# Altium PCB PCB1.PcbDoc (part 2 of 2)
Units mm, origin at the board's own origin, x right, y up, seen from the top; angles counter-clockwise.
Board outline 100 x 100 mm, 2 copper layers (Top Layer, Bottom Layer); 175 components, 138 nets, 674 pads, 476 vias.
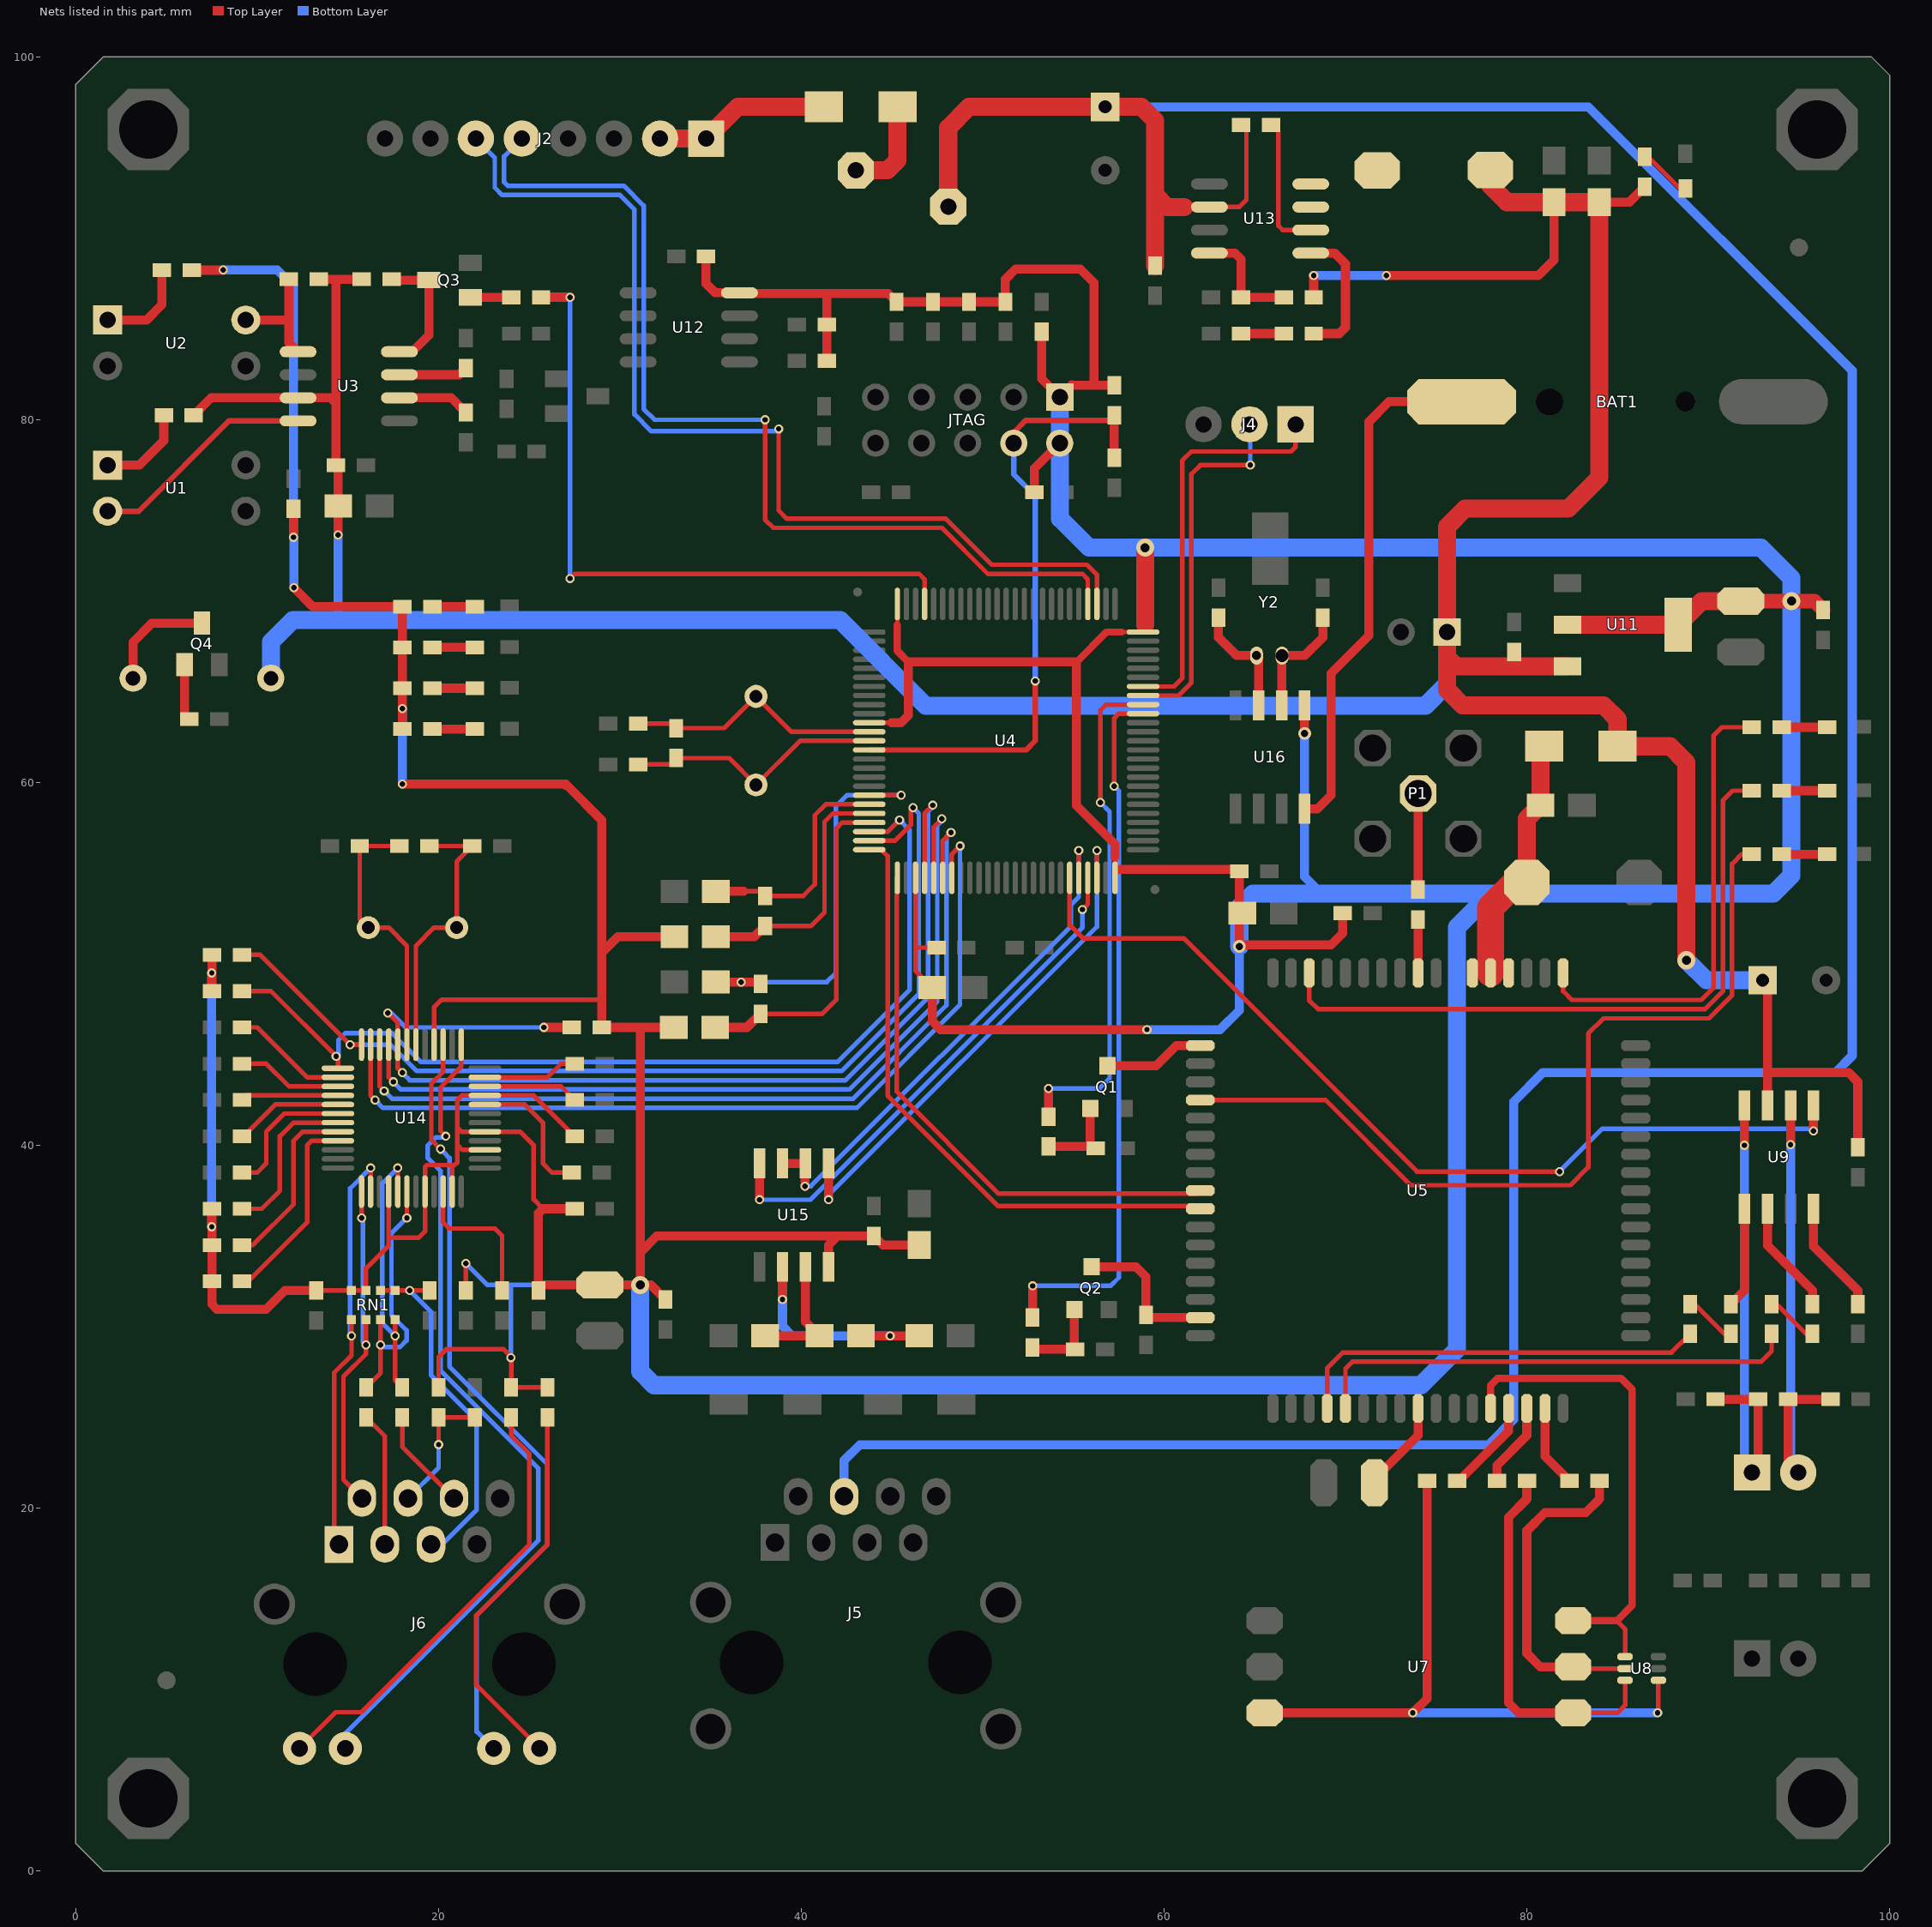
[diagram p2: the nets of this part, all layers, seen from the top]

## Via types
v1: diameter 0.5, hole 0.3, Top Layer to Bottom Layer, tented both sides, 470 vias
v2: diameter 1, hole 0.5, Top Layer to Bottom Layer, tented both sides, 4 vias
v3: diameter 0.7, hole 0.4, Top Layer to Bottom Layer, tented both sides, 2 vias

## Nets (pads, with @x,y where several pads share a name; then routed paths per layer and width w, separated by ;. In a path a pad name is that pad's centre, name@x,y a point inside that pad or via, vN(x,y) a via of type N, cw(c..) or ccw(c..) an arc to the next point about the centre after c; other vN are vias at no path point) (continued)
NET_CS: R61.2 U4.29 U14.32 | length 60.1
  Top Layer w0.254: v1(17.2,47.3) 17.75,46.75 U14.32@17.75,45.55 17.75,44.25 v1(18,44) ; U4.29@46.794,54.748 46.794,58.294 v1(47.25,58.75)
  Top Layer w0.5: v1(25.8,46.5) R61.2@27.349,46.5
  Bottom Layer w0.254: v1(17.2,47.3) 17.377,47.3 18.177,46.5 v1(25.8,46.5) ; v1(18,44) 18.414,43.586 42.431,43.586 46.984,48.139 46.984,58.392 47.25,58.658 v1(47.25,58.75)
NET_INT: R53.2 U4.24 U14.36 | length 56.4
  Top Layer w0.254: R53.2@9.151,50.5 9.25,50.5 10.163,50.5 v1(15.113,45.55) U14.36@15.75,45.55 ; U4.24@43.744,56.798 45.168,56.798 46.046,57.676 46.046,58.518 v1(46.152,58.623)
  Bottom Layer w0.254: v1(15.113,45.55) 17.342,45.55 18.798,44.094 42.221,44.094 46.476,48.35 46.476,58.299 v1(46.152,58.623)
NET_RST: R59.2 U4.23 U14.37 | length 53.8
  Top Layer w0.254: R59.2@9.151,48.5 10.758,48.5 v1(14.351,44.907) 14.45,44.808 U14.37@14.45,44.25 ; U4.23@43.744,57.298 44.776,57.298 v1(45.415,57.937)
  Bottom Layer w0.254: v1(14.351,44.907) 14.482,45.038 14.482,45.811 14.852,46.181 17.43,46.181 19.008,44.602 42.01,44.602 45.968,48.56 45.968,57.385 v1(45.415,57.937)
NetBAT1_1: BAT1.1 U16.8 | length 28.8
  Top Layer w0.5: U16.8@67.75,58.55 68.45,58.55 69.2,59.3 69.2,66.018 71.282,68.1 71.282,79.882 72.4,81 74.8,81 BAT1.1@76.398,81
NetBEEP1_2: BEEP1.2 Q4.3 | length 6.2
  Top Layer w0.5: BEEP1.2@3.15,65.75 3.15,67.75 4.186,68.786 Q4.3@6.952,68.786
NetC10_2: C10.2 Q2.3 U5.16 | length 8.4
  Top Layer w0.5: Q2.3@56,33.302 58.448,33.302 59,32.75 C10.2@59,30.651 59.151,30.5 U5.16@62,30.5
NetC11_1: C11.1 L1.2 U4.20 | length 12.8
  Top Layer w0.254: 36.83,54 C11.1@38,54 ; C11.1@38,53.75 40.107,53.75 40.742,54.385 40.742,58.191 41.348,58.798 U4.20@43.744,58.798
  Top Layer w0.5: L1.2@35.286,54 36.83,54
NetC11_2: C11.2 L2.2 U4.21 | length 14.2
  Top Layer w0.254: C11.2@38,52.099 40.538,52.099 41.275,52.836 41.275,57.836 41.737,58.298 U4.21@43.744,58.298
  Top Layer w0.5: L2.2@35.286,51.5 37.401,51.5 C11.2@38,52.099
NetC12_1: C12.1 U5.26 | length 5
  Top Layer w0.5: C12.1@71.5,21.5 74,24 U5.26@74,25.5
NetC17_1: C17.1 L3.1 U4.22 | length 18.7
  Top Layer w0.254: C17.1@37.75,47.25 41.154,47.25 41.935,48.031 41.935,57.48 42.253,57.798 U4.22@43.744,57.798
  Top Layer w0.5: L3.1@35.25,46.5 37,46.5 C17.1@37.75,47.25
NetC17_2: C17.2 L4.2 U4.19 | length 22.6
  Top Layer w0.254: U4.19@43.744,59.298 v1(45.506,59.298)
  Top Layer w0.5: L4.2@35.286,49 v1(36.678,49) C17.2@37.651,49
  Bottom Layer w0.254: v1(36.678,49) 41.405,49 41.91,49.505 41.91,58.699 42.509,59.298 v1(45.506,59.298)
NetC23_1: C23.1 R24.2 | length 2.9
  Top Layer w0.254: C23.1@89,31.25 89.25,31.25 90.901,29.599 R24.2@91.25,29.599
NetC24_1: C24.1 R25.2 | length 2.9
  Top Layer w0.254: C24.1@93.5,31.25 93.75,31.25 95.401,29.599 R25.2@95.75,29.599
NetC25_1: C25.1 U9.4 | length 6.3
  Top Layer w0.5: U9.4@95.81,36.5 95.81,34.44 98.25,32 C25.1@98.25,31.25
NetC31_1: C31.1 C33.2 J3.1 U9.8 | length 26.9
  Top Layer w0.5: C33.2@90.401,26 C31.1@92.75,26 92.75,22.29 J3.1@92.42,21.96 ; v1(92,40) U9.8@92,42.2
  Bottom Layer w0.5: v1(92,40) 92,22.38 J3.1@92.42,21.96
NetC31_2: C31.2 C34.1 J3.2 U9.6 | length 27
  Top Layer w0.5: v1(94.54,40.04) U9.6@94.54,42.2 ; J3.2@94.96,21.96 94.401,22.519 C31.2@94.401,26 C34.1@96.75,26
  Bottom Layer w0.5: v1(94.54,40.04) 94.54,22.38 J3.2@94.96,21.96
NetC43_1: C43.1 R42.2 | length 2.3
  Top Layer w0.5: C43.1@64.25,84.75 R42.2@66.599,84.75
NetC56_2: C56.2 U14.20 | length 7.7
  Top Layer w0.254: U14.20@22.55,42.25 24.75,42.25 25.75,41.25 25.75,39 26.25,38.5 C56.2@27.349,38.5
NetC57_1: C57.1 U14.22 | length 5.3
  Top Layer w0.254: U14.22@22.55,43.25 26.75,43.25 C57.1@27.5,42.5
NetC58_2: C58.2 U16.2 Y2.1 | length 6.5
  Top Layer w0.5: U16.2@66.48,64.25 66.48,66.98 Y2.1@66.5,67 67.75,67 68.75,68 C58.2@68.75,69.099
NetC59_2: C59.2 U16.3 Y2.2 | length 6.4
  Top Layer w0.5: C59.2@63,69.099 63,68 64,67 Y2.2@65.1,67 65.21,66.89 U16.3@65.21,64.25
NetC60_2: C60.2 R60.1 U14.30 Y3.1 | length 15.3
  Top Layer w0.254: U14.30@18.75,45.55 18.75,51 19.75,52 Y3.1@21,52 21,55.651 C60.2@21.849,56.5 R60.1@19.5,56.5
NetC61_2: C61.2 R60.2 U14.31 Y3.2 | length 14.9
  Top Layer w0.254: R60.2@17.849,56.5 C61.2@15.651,56.5 15.651,52.469 Y3.2@16.12,52 17.25,52 18.25,51 U14.31@18.25,45.55
NetC64_1: C64.1 J6.5 RN1.1 RN1.3 | length 19.6
  Top Layer w0.254: RN1.3@16.8,32 RN1.1@17.6,32 v1(18.4,32) C64.1@19.5,32
  Bottom Layer w0.254: v1(18.4,32) 19.58,30.82 19.58,27.32 22.1,24.8 22.1,19.9 20.2,18 J6.5@19.58,18
NetC65_1: C65.1 J6.3 | length 7.4
  Top Layer w0.254: C65.1@16,25 17.04,23.96 J6.3@17.04,18
NetC66_1: C66.1 J6.6 | length 5.6
  Top Layer w0.254: C66.1@18,25 18,23.39 J6.6@20.85,20.54
NetC68_1: C68.1 J6.4 R64.1 | length 7.2
  Top Layer w0.254: v1(20,23.5) R64.1@20,25 C68.1@22,25
  Bottom Layer w0.254: J6.4@18.31,20.54 20,22.23 v1(20,23.5)
NetD1_1: D1.1 R10.1 | length 2.5
  Top Layer w0.5: R10.1@94.05,56.05 D1.1@96.55,56.05
NetD2_1: D2.1 R15.1 | length 2.5
  Top Layer w0.5: R15.1@94.05,59.55 D2.1@96.55,59.55
NetD3_1: D3.1 R19.1 | length 2.5
  Top Layer w0.5: R19.1@94.05,63.05 D3.1@96.55,63.05
NetD4_2: D4.2 F2.1 | length 5.5
  Top Layer w1: F2.1@43,93.75 44.75,93.75 45.3,94.3 D4.2@45.3,97.25
NetD6_1: D6.1 R37.2 | length 2.3
  Top Layer w0.5: R37.2@19.651,69.7 D6.1@22,69.7
NetD7_1: D7.1 R38.2 | length 2.3
  Top Layer w0.5: R38.2@19.651,67.45 D7.1@22,67.45
NetD8_1: D8.1 R39.2 | length 2.3
  Top Layer w0.5: R39.2@19.651,65.2 D8.1@22,65.2
NetD9_1: D9.1 R40.2 | length 2.3
  Top Layer w0.5: R40.2@19.651,62.95 D9.1@22,62.95
NetD10_1: D10.1 R72.1 | length 3
  Top Layer w0.254: R72.1@86.5,94.5 86.7,94.5 88.45,92.75 D10.1@88.75,92.75
NetF3_1: F3.1 R58.2 U15.6 | length 12.6
  Top Layer w0.5: v1(38.96,31.5) U15.6@38.96,33.3 ; R58.2@43.286,29.5 v1(44.893,29.5) F3.1@46.5,29.5
  Bottom Layer w0.5: v1(38.96,31.5) 38.96,30.04 39.5,29.5 v1(44.893,29.5)
NetF4_1: F4.1 R58.1 U15.7 | length 7.1
  Top Layer w0.5: F4.1@38,29.5 R58.1@41,29.5 40.23,30.27 U15.7@40.23,33.3
NetJ6_9: J6.9 R62.2 | length 24.7
  Top Layer w0.254: J6.9@12.325,6.75 14.325,8.75 15.75,8.75 25,18 25,23 24,24 R62.2@24,24.999
NetJ6_10: J6.10 U14.25 | length 47
  Top Layer w0.254: v1(20.4,40.5) 20.108,40.792 20.108,43.19 20.8,43.882 20.8,43.9 21.25,44.35 U14.25@21.25,45.55
  Bottom Layer w0.254: J6.10@14.856,6.75 14.856,7.378 14.856,7.574 25.492,18.21 25.492,22.19 20.1,27.582 20.1,38.6 19.4,39.3 19.4,39.992 19.839,40.431 20.331,40.431 v1(20.4,40.5)
NetJ6_11: J6.11 U14.27 | length 43.6
  Top Layer w0.254: v1(20.1,39.8) 19.6,40.3 19.6,43.4 20.25,44.05 U14.27@20.25,45.55
  Bottom Layer w0.254: v1@20.1,39.623 v1(20.1,39.8) ; 20.277,39.623 20.6,39.3 20.6,27.8 26,22.4 26,18 22.1,14.1 22.1,7.681 J6.11@23.031,6.75
NetJ6_12: J6.12 R63.2 | length 21.3
  Top Layer w0.254: J6.12@25.574,6.75 22.074,10.25 22.074,14.074 26,18 R63.2@26,24.999
NetL6_1: L6.1 U13.7 U13.8
NetP1_1: P1.1 R16.1 | length 5.3
  Top Layer w0.5: R16.1@74,54.1 74,56.6 P1.1@74,59.4
NetQ1_2: Q1.2 R2.2 R3.2 | length 4.7
  Top Layer w0.5: R2.2@53.626,39.932 56.126,39.932 55.926,40.132 Q1.2@55.926,42.035
NetQ2_2: Q2.2 R5.2 R9.2 | length 4.6
  Top Layer w0.5: R5.2@52.75,28.849 52.849,28.75 R9.2@55.099,28.75 55.05,28.799 Q2.2@55.05,30.952
NetQ3_1: Q3.1 R7.1 | length 2.3
  Top Layer w0.5: Q3.1@21.75,86.75 R7.1@24,86.75
NetQ3_3: Q3.3 R13.2 U3.8 | length 7.1
  Top Layer w0.5: R13.2@17.401,87.75 17.448,87.703 Q3.3@19.464,87.703 19.464,84.664 18.55,83.75 U3.8@17.838,83.75
NetQ4_1: Q4.1 R28.1 | length 3.1
  Top Layer w0.5: Q4.1@6,66.5 6,63.75 R28.1@6.25,63.5
NetR6_1: R6.1 U2.1 | length 5.3
  Top Layer w0.5: U2.1@1.75,85.5 3.9,85.5 4.75,86.35 R6.1@4.75,88.25
NetR10_2: R10.2 U5.4 | length 48.5
  Top Layer w0.254: U5.4@62,42.5 68.9,42.5 73.6,37.8 82.4,37.8 83.388,38.788 83.388,46.162 84.226,47 90.037,47 91.316,48.279 91.316,55.516 91.85,56.05 R10.2@92.399,56.05
NetR11_2: R11.2 U1.1 | length 5.1
  Top Layer w0.5: U1.1@1.75,77.5 3.5,77.5 4.849,78.849 R11.2@4.849,80.25
NetR14_1: R14.1 U2.4 U3.1 | length 6.6
  Top Layer w0.5: U2.4@9.37,85.5 11.75,85.5 ; R14.1@11.75,87.75 11.75,84.25 U3.1@12.25,83.75
NetR15_2: R15.2 U5.66 | length 37.3
  Top Layer w0.254: U5.66@68,49.5 68,48 68.492,47.508 89.826,47.508 90.808,48.49 90.808,59.008 91.35,59.55 R15.2@92.399,59.55
NetR16_2: R16.2 U5.60 | length 3.6
  Top Layer w0.5: U5.60@74,49.5 74,51.9 ; 74,51.25 R16.2@74,52.449
NetR17_2: R17.2 U3.7 | length 3.8
  Top Layer w0.5: U3.7@17.838,82.48 21.131,82.48 R17.2@21.5,82.849
NetR18_2: R18.2 U3.6 | length 4
  Top Layer w0.5: U3.6@17.838,81.21 20.691,81.21 R18.2@21.5,80.401
NetR19_2: R19.2 U5.52 | length 26
  Top Layer w0.254: U5.52@82,49.5 82,48.5 82.484,48.016 89.616,48.016 90.3,48.7 90.3,62.6 90.75,63.05 R19.2@92.399,63.05
NetR21_1: R21.1 U7.1 U8.1 | length 36.6
  Top Layer w0.254: v1(87.21,8.71) 87.25,8.75 U8.1@87.25,10.5
  Top Layer w0.5: U7.1@65.55,8.71 v1(73.71,8.71) 74.5,9.5 R21.1@74.5,21.5
  Bottom Layer w0.5: v1(73.71,8.71) v1(87.21,8.71)
NetR22_1: R22.1 U7.5 U8.5 | length 18.2
  Top Layer w0.254: U7.5@82.55,11.25 82.65,11.15 U8.5@85.421,11.15
  Top Layer w0.5: U7.5@82.55,11.25 80.75,11.25 80,12 80,18.75 81,19.75 83.25,19.75 84,20.5 R22.1@84,21.5
NetR23_1: R23.1 U7.4 U8.6 | length 20.9
  Top Layer w0.254: U7.4@82.55,8.71 85,8.71 85.421,9.131 U8.6@85.421,10.5
  Top Layer w0.5: R23.1@80,21.5 80,20.5 79,19.5 79,9.25 79.54,8.71 U7.4@82.55,8.71
NetR24_1: R24.1 U9.1 | length 5.6
  Top Layer w0.5: R24.1@91.25,31.25 92,32 U9.1@92,36.5
NetR25_1: R25.1 U9.2 | length 6.3
  Top Layer w0.5: U9.2@93.27,36.5 93.27,34.48 95.75,32 R25.1@95.75,31.25
NetR41_2: R41.2 U13.6 | length 7.6
  Top Layer w0.254: R41.2@65.901,96.25 66.3,95.851 66.3,90.7 66.54,90.46 U13.6@68.088,90.46
NetR42_1: R42.1 U13.5 | length 7.6
  Top Layer w0.5: U13.5@68.088,89.19 69.41,89.19 70,88.6 70,85.1 69.65,84.75 R42.1@68.25,84.75
NetR43_1: R43.1 R44.2 U13.4 | length 6.3
  Top Layer w0.5: U13.4@62.5,89.19 63.91,89.19 64.25,88.85 R43.1@64.25,86.75 R44.2@66.599,86.75
NetR47_2: R47.2 U14.10 | length 8.3
  Top Layer w0.254: U14.10@20.25,37.45 20.25,35.75 20.583,35.417 23.105,35.417 23.5,35.022 R47.2@23.5,32.001
NetR48_2: R48.2 U14.45 | length 11
  Top Layer w0.254: R48.2@9.151,32.5 9.5,32.5 12.75,35.75 12.75,40 13,40.25 U14.45@14.45,40.25
NetR49_1: R49.1 U14.23 | length 5.3
  Top Layer w0.254: U14.23@22.55,43.75 26,43.75 26.75,44.5 R49.1@27.5,44.5
NetR50_2: R50.2 U14.44 | length 9.9
  Top Layer w0.254: R50.2@9.151,34.5 9.75,34.5 12,36.75 12,40.25 12.5,40.75 U14.44@14.45,40.75
NetR51_2: R51.2 U14.43 | length 9
  Top Layer w0.254: R51.2@9.151,36.5 10.25,36.5 11.25,37.5 11.25,40.5 12,41.25 U14.43@14.45,41.25
NetR52_2: R52.2 U14.42 | length 7.7
  Top Layer w0.254: R52.2@9.151,38.5 10,38.5 10.5,39 10.5,40.75 11.5,41.75 U14.42@14.45,41.75
NetR54_2: R54.2 U14.41 | length 6
  Top Layer w0.254: R54.2@9.151,40.5 9.25,40.5 11,42.25 U14.41@14.45,42.25
NetR55_2: R55.2 U14.40 | length 5.4
  Top Layer w0.254: R55.2@9.151,42.5 9.401,42.75 U14.40@14.45,42.75
NetR56_2: R56.2 U14.39 | length 5.8
  Top Layer w0.254: R56.2@9.151,44.5 10.5,44.5 11.75,43.25 U14.39@14.45,43.25
NetR57_2: R57.2 U14.38 | length 6.4
  Top Layer w0.254: R57.2@9.151,46.5 10,46.5 12.75,43.75 U14.38@14.45,43.75
NetU1_2: U1.2 U3.4 | length 12.6
  Top Layer w0.3: U1.2@1.75,74.96 3.46,74.96 8.44,79.94 U3.4@12.25,79.94
OSC_IN: C1.1 R1.1 U4.12 Y1.1 | length 14.4
  Top Layer w0.254: C1.1@31,63.25 32.85,63.25 R1.1@33.1,63 35.75,63 Y1.1@37.5,64.75 39.452,62.798 U4.12@43.744,62.798
OSC_OUT: C3.1 R1.2 U4.13 Y1.2 | length 14.5
  Top Layer w0.254: C3.1@31,61 32.751,61 R1.2@33.1,61.349 36.021,61.349 Y1.2@37.5,59.87 39.928,62.298 U4.13@43.744,62.298
"PA2  USART2_TX": U4.25 U5.10 | length 34.2
  Top Layer w0.254: U4.25@43.744,56.298 44.402,56.298 44.755,55.945 44.755,42.745 50.849,36.651 61.849,36.651 U5.10@62,36.5
"PA3  USART2_RX": U4.26 U5.9 | length 30.9
  Top Layer w0.254: U4.26@45.263,54.748 45.263,42.955 50.88,37.338 61.838,37.338 U5.9@62,37.5
"PA9  USART1_TX": J4.2 U4.68 | length 20.2
  Top Layer w0.254: U4.68@58.844,64.798 60.798,64.798 61.508,65.508 61.508,77.008 62,77.5 v1(64.75,77.5)
  Bottom Layer w0.254: J4.2@64.71,79.75 64.75,79.71 v1(64.75,77.5)
"PA10  USART1_RX": J4.1 U4.69 | length 22.2
  Top Layer w0.254: U4.69@58.844,65.298 60.548,65.298 61,65.75 61,77.75 61.5,78.25 67,78.25 67.25,78.5 J4.1@67.25,79.75
"PC10  UART4_TX": J2.6 U4.78 | length 56.1
  Top Layer w0.254: v1(38.75,79.5) 38.75,75 39.202,74.548 47.96,74.548 50.5,72.008 55.742,72.008 56.294,71.456 U4.78@56.294,69.848
  Bottom Layer w0.254: J2.6@22.05,95.5 23.1,94.45 23.1,92.8 23.508,92.392 30,92.392 30.8,91.592 30.8,80.3 31.731,79.369 38.619,79.369 v1(38.75,79.5)
"PC11  UART4_RX": J2.5 U4.79 | length 55.2
  Top Layer w0.254: v1(38,80) 38,74.5 38.46,74.04 47.75,74.04 50.29,71.5 55.5,71.5 55.794,71.206 U4.79@55.794,69.848
  Bottom Layer w0.254: J2.5@24.59,95.5 23.608,94.518 23.608,93.1 23.808,92.9 30.21,92.9 31.308,91.802 31.308,80.6 31.908,80 v1(38,80)
PWRKEY: Q1.3 U5.1 | length 5.7
  Top Layer w0.5: Q1.3@56.924,44.433 Q1.3@56.876,44.385 59.566,44.385 60.681,45.5 U5.1@62,45.5
PX.Y: R7.2 U4.97 | length 38.2
  Top Layer w0.254: v1(27.25,71.25) 27.5,71.5 46.5,71.5 46.794,71.206 U4.97@46.794,69.848
  Top Layer w0.52: R7.2@25.651,86.75 v1(27.25,86.75)
  Bottom Layer w0.254: v1(27.25,71.25) v1(27.25,86.75)
R\E\A\D\Y/BUSY: U4.45 U9.5 | length 51.7
  Top Layer w0.254: U4.45@54.794,54.748 54.794,52.146 55.531,51.41 61.087,51.41 73.943,38.554 v1(81.8,38.554)
  Top Layer w0.5: v1(95.81,40.794) U9.5@95.81,42.2
  Bottom Layer w0.254: v1(81.8,38.554) 84.163,40.917 95.687,40.917 v1(95.81,40.794)
RESET: C37.2 JTAG.4 R35.1 U4.14 | length 35.1
  Top Layer w0.3: U4.14@43.744,61.798 52.398,61.798 52.9,62.3 v1(52.9,65.6) ; JTAG.4@51.71,78.71 51.71,79.31 52.364,79.964 56.964,79.964 R35.1@57.25,80.25
  Top Layer w0.5: C37.2@57.25,77.901 R35.1@57.25,80.25
  Bottom Layer w0.3: JTAG.4@51.71,78.71 51.71,76.99 52.9,75.8 v1(52.9,65.6)
RS485_RE: U4.46 U15.2 U15.3 | length 29
  Top Layer w0.254: U15.2@40.208,38.978 U15.2@40.23,39 ; U4.46@55.294,54.748 v1(55.294,56.25)
  Top Layer w0.5: U15.3@38.96,39 U15.2@40.23,39 ; v1(40.208,37.744) U15.2@40.208,38.978
  Bottom Layer w0.254: v1(40.208,37.744) 40.526,37.744 54.869,52.087 54.869,53.261 55.294,53.686 v1(55.294,56.25)
RS485_RX: U4.48 U15.1 | length 28.9
  Top Layer w0.254: U4.48@56.294,54.748 v1(56.294,56.25)
  Top Layer w0.5: v1(41.5,37) U15.1@41.5,39
  Bottom Layer w0.254: v1(41.5,37) 41.5,37.25 56.294,52.044 v1(56.294,56.25)
RS485_TX: U4.47 U15.4 | length 28.9
  Top Layer w0.254: v1(55.5,53) 55.794,53.294 U4.47@55.794,54.748
  Top Layer w0.5: v1(37.69,37) U15.4@37.69,39
  Bottom Layer w0.254: v1(37.69,37) 40.5,37 55.5,52 v1(55.5,53)
RXN: C66.2 RN1.2 U14.5 | length 15.1
  Top Layer w0.254: RN1.2@17.6,30.4 v1(17.6,29.5) 17.6,27.051 C66.2@18,26.651 ; U14.5@17.75,37.45 v1(17.75,38.75)
  Bottom Layer w0.254: v1(17.6,29.5) 16.9,30.2 16.9,37.9 v1(17.75,38.75)
RXP: C65.2 RN1.4 U14.6 | length 14.6
  Top Layer w0.254: C65.2@16,26.651 16.8,27.451 v1(16.8,29) RN1.4@16.8,30.4 ; v1(18.25,36) U14.6@18.25,37.45
  Bottom Layer w0.254: v1(16.8,29) 16.931,28.869 17.861,28.869 18.231,29.239 18.231,29.8 17.4,30.631 17.4,35.15 v1(18.25,36)
SIM900_RST: R5.1 U4.66 | length 39.3
  Top Layer w0.254: v1(57.252,59.8) 57.252,63.551 57.499,63.798 U4.66@58.844,63.798
  Top Layer w0.5: R5.1@52.75,30.5 v1(52.75,32.25)
  Bottom Layer w0.254: v1(52.75,32.25) 57.048,32.25 57.506,32.707 57.506,59.546 v1(57.252,59.8)
SIM_CLK: R23.2 U5.32 | length 4.7
  Top Layer w0.5: R23.2@78.349,21.5 78.349,22.349 80,24 U5.32@80,25.5
SIM_DATA: R21.2 U5.31 | length 5.2
  Top Layer w0.5: R21.2@76.151,21.5 76.25,21.5 79,24.25 U5.31@79,25.5
SIM_PWRKEY: R2.1 U4.67 | length 28.1
  Top Layer w0.254: v1(56.49,58.9) 56.49,63.983 56.805,64.298 U4.67@58.844,64.298
  Top Layer w0.5: R2.1@53.626,41.583 v1(53.626,43.133)
  Bottom Layer w0.254: v1(53.626,43.133) 56.439,43.133 56.998,43.692 56.998,58.392 v1(56.49,58.9)
SIM_RST: R22.2 U5.33 | length 4.6
  Top Layer w0.5: U5.33@81,25.5 81,22.849 R22.2@82.349,21.5
SIM_VDD: U5.30 U7.6 U8.4 | length 27.8
  Top Layer w0.254: 84.96,13.79 85.421,13.329 U8.4@85.421,11.8
  Top Layer w0.4: U5.30@78,25.5 78,26.768 78.384,27.153 85.192,27.153 85.801,26.543 85.801,14.631 84.96,13.79 U7.6@82.55,13.79
  Top Layer w0.5: U7.6@82.118,14.222 U7.6@82.55,13.79
SPI1_MISO: U4.31 U14.34 | length 48.3
  Top Layer w0.254: U14.34@16.75,45.55 16.75,43.25 v1(17,43) ; U4.31@47.794,54.748 47.794,56.794 v1(48.25,57.25)
  Bottom Layer w0.254: v1(17,43) 17.43,42.57 42.852,42.57 48,47.718 48,57 v1(48.25,57.25)
SPI1_MOSI: U4.32 U14.35 | length 48.6
  Top Layer w0.254: U14.35@16.25,45.55 16.25,42.75 v1(16.5,42.5) ; U4.32@48.294,54.748 48.294,56.044 v1(48.75,56.5)
  Bottom Layer w0.254: v1(16.5,42.5) 16.938,42.062 43.062,42.062 48.75,47.75 v1(48.75,56.5)
SPI1_SCK: U4.30 U14.33 | length 47.9
  Top Layer w0.254: U14.33@17.25,45.55 17.25,43.75 v1(17.5,43.5) ; U4.30@47.294,54.748 47.294,57.544 v1(47.75,58)
  Bottom Layer w0.254: v1(17.5,43.5) 17.922,43.078 42.642,43.078 47.492,47.929 47.492,57.642 47.75,57.9 v1(47.75,58)
SPK+: C23.2 U5.21 | length 23
  Top Layer w0.254: U5.21@69,25.5 69,27.725 69.85,28.575 87.976,28.575 C23.2@89,29.599
SPK-: C24.2 U5.22 | length 27
  Top Layer w0.254: U5.22@70,25.5 70,27.684 70.383,28.067 92.916,28.067 93.5,28.651 C24.2@93.5,29.599
TXN: J6.2 RN1.6 U14.1 | length 19.4
  Top Layer w0.254: v1(15.75,36) U14.1@15.75,37.45 ; J6.2@15.77,20.54 14.75,21.56 14.75,27.25 16,28.5 RN1.6@16,30.4
  Bottom Layer w0.254: v1(15.75,36) 15.831,35.919 15.831,29.169 v1(16,29)
TXP: J6.1 RN1.8 U14.2 | length 24
  Top Layer w0.254: J6.1@14.5,18 14.242,18.258 14.242,27.46 15.2,28.418 v1(15.2,29.5) RN1.8@15.2,30.4 ; U14.2@16.25,37.45 v1(16.25,38.75)
  Bottom Layer w0.254: v1(15.2,29.5) 15.119,29.581 15.119,37.619 v1(16.25,38.75)
VCC+3.3V: C5.2 C6.2 C7.2 C8.2 C9.2 C38.2 C45.1 C46.1 C47.1 C48.1 C50.1 C51.1 C53.1 C54.1 C55.1 C62.1 C63.1 C67.1 C69.2 JTAG.1 JTAG.2 L2.1 L3.2 R4.2 R6.2 R29.1 R30.1 R31.1 R35.2 R36.1 R37.1 R38.1 R39.1 R40.1 R45.2 R46.2 R48.1 R50.1 R51.1 R53.1 R59.1 R61.1 R62.1 R63.1 R64.2 RN1.5 RN1.7 U4.11 U4.28 U4.50 U4.75 U4.100 U11.2 U11.4 U12.8 U14.4 U14.8 U14.11 U14.15 U14.17 U14.21 U14.28 U15.8 U16.1 | length 555.5
  Top Layer w0.254: C67.1@13.25,32 RN1.7@15.2,32 RN1.5@16,32 16,33.221 17.25,34.471 U14.4@17.25,37.45 ; 17.266,34.9 18.9,34.9 19.25,35.25 U14.8@19.25,37.45 19.25,38.808 19.355,38.913 20.75,38.913 ; U14.28@19.75,45.55 19.75,47.614 20.168,48.031 28.924,48.031 ; R64.2@20,26.651 20,28.331 20.422,28.753 23.597,28.753 24,28.349 R62.1@24,26.65 R63.1@26,26.65 ; U14.11@20.75,37.45 20.75,38.913 ; C47.1@21.5,32 v1(21.5,33.491) ; U14.15@22.55,39.75 21.312,39.75 21.031,40.03 ; 25.756,36.5 25.242,37.014 25.242,40.008 24.5,40.75 U14.17@22.55,40.75 21.251,40.75 21.031,40.97 ; C53.1@27.5,40.5 25.25,42.75 U14.21@22.55,42.75 21.287,42.75 21.031,42.494 21.031,40.97 ; U4.11@43.744,63.298 44.985,63.298 ; 45.294,68.694 U4.100@45.294,69.848 ; U4.28@46.294,54.748 46.294,49.62 C5.2@47.214,48.7 ; 46.318,50.9 C8.2@47.449,50.9 ; C38.2@53.151,84.849 C38.2@53.25,84.849 ; U4.50@57.294,54.748 57.294,55.9 ; 57.669,68.298 U4.75@58.844,68.298 ; 20.75,38.913 20.879,38.913 21.031,39.065 21.031,40.03 ; 21.031,40.03 21.031,40.97
  Top Layer w0.4: 45.284,68.684 45.284,67.266 45.9,66.65 ; 55.169,66.65 56.817,68.298 57.669,68.298
  Top Layer w0.5: R6.2@6.401,88.25 8.113,88.25 v1(8.128,88.265) ; R51.1@7.5,36.5 R50.1@7.5,34.5 R48.1@7.5,32.5 7.5,31.235 7.772,30.963 10.49,30.963 11.528,32 C67.1@13.25,32 ; R59.1@7.5,48.5 R53.1@7.5,50.5 ; R4.2@11.938,75.037 R4.2@12,75.099 v1(12,73.522) ; v1(12.014,70.739) 13.053,69.7 R37.1@18,69.7 R38.1@18,67.45 R39.1@18,65.2 v1(18,64.084) R40.1@18,62.95 ; v1(18,59.91) 27.009,59.91 ; 27.009,59.842 27.076,59.842 29,57.919 29,50.615 ; C54.1@27.5,36.5 25.756,36.5 25.5,36.244 C51.1@25.5,32 25.8,32.3 29,32.3 v2(31.115,32.3) ; C46.1@32.5,31.5 31.7,32.3 v2(31.115,32.3) ; L3.2@32.964,46.5 31.115,46.5 ; L2.1@33,51.5 29.885,51.5 29,50.615 ; C50.1@34.75,89 34.75,87.5 35.25,87 U12.8@36.588,87 36.628,86.96 41.25,86.96 ; R46.2@41.401,83.25 R45.2@41.401,85.25 41.401,86.809 41.25,86.96 ; U15.8@41.5,33.3 41.5,34.5 42,35 ; 44.985,63.298 45.498,63.298 45.9,63.7 45.9,66.65 55.169,66.65 55.169,58.731 57.294,56.606 57.294,55.9 ; C62.1@46.5,34.5 44.5,34.5 C63.1@44,35 42,35 ; C5.2@47.214,48.7 47.214,46.842 47.676,46.38 v1(59.055,46.38) ; C7.2@52.849,76 52.849,77.309 JTAG.2@54.25,78.71 ; C38.2@53.25,84.849 53.25,82.25 JTAG.1@54.25,81.25 JTAG.1@54.901,81.901 ; JTAG.1@54.915,81.915 JTAG.1@54.901,81.901 ; R35.2@57.25,81.901 56.134,81.901 ; 57.5,55.206 64.043,55.206 C9.2@64.149,55.1 v3(64.149,50.964) 64.235,51.05 69.2,51.05 69.849,51.699 C69.2@69.849,52.8 ; v3(67.75,62.704) U16.1@67.75,64.25 ; 29,50.615 R61.1@29,46.5 31.115,46.5 ; v2(31.115,32.3) 31.115,34.087 ; 31.115,34.087 32.028,35 42,35 ; 31.115,34.087 31.115,46.5 ; 41.25,86.96 44.79,86.96 R36.1@45.25,86.5 R29.1@51.25,86.5 51.25,87.75 51.816,88.316 55.372,88.316 56.134,87.554 56.134,81.901 ; JTAG.1@54.901,81.901 56.134,81.901
  Top Layer w0.8: C45.1@92,70 95.862,70 C48.1@96.342,69.52
  Top Layer w1: 58.953,68.707 v2(58.953,72.949) ; U11.2@82.25,68.7 U11.4@88.346,68.7 89.646,70 C45.1@92,70
  Bottom Layer w0.254: v1(21.5,33.491) 22.691,32.3 v2(31.115,32.3) ; v1(23.978,28.296) 23.978,32.275
  Bottom Layer w0.5: v1(7.493,35.509) v1(7.493,49.505) ; v1(8.128,88.265) 11.1,88.265 12,87.365 v1(12,73.522) ; v1(12.014,70.739) v1@12.014,73.508 ; v1(18,59.91) v1(18,64.084) ; v1(59.055,46.38) 63.094,46.38 64.149,47.436 v3(64.149,50.964) ; v3(67.75,62.704) 67.75,54.805 68.682,53.873
  Bottom Layer w1: v2(31.115,32.3) 31.115,27.534 31.877,26.772 74.168,26.772 76.149,28.753 76.149,52.019 78.003,53.873 ; JTAG.1@54.25,81.25 JTAG.2@54.25,78.71 54.25,74.553 55.855,72.949 v2(58.953,72.949) 92.913,72.949 94.59,71.272 v2(94.59,70.002) 94.59,54.864 93.599,53.873 78.003,53.873 ; v3(64.149,50.964) 64.149,53.125 64.897,53.873 68.682,53.873 78.003,53.873
VCC+4V: C14.1 C15.1 D21.2 U5.55 U5.56 U5.57 | length 14.1
  Top Layer w1: C14.1@80,54.5 80,58 C15.1@80.75,58.75 80.75,61.8 D21.2@80.95,62
  Top Layer w1.5: U5.56@78,49.5 78,53.1 79.4,54.5 C14.1@80,54.5
VCC+5V: BEEP1.1 C13.2 C16.2 C30.1 C32.2 C39.1 C41.1 C49.1 C52.1 D21.1 L6.2 R11.1 R13.1 R14.2 R44.1 R72.2 U3.3 U9.7 U11.3 | length 218
  Top Layer w0.5: R11.1@6.5,80.25 7.46,81.21 U3.3@12.25,81.21 14.04,81.21 14.349,80.901 ; R14.2@13.401,87.75 R13.1@15.75,87.75 ; 14.349,87.75 14.349,80.901 ; v1(14.464,73.649) C13.2@14.464,75.25 14.464,77.385 C16.2@14.349,77.5 14.349,80.901 ; R44.1@68.25,86.75 v1(68.25,87.95) ; v1(72.263,87.95) 80.635,87.95 81.5,88.815 C49.1@81.5,92 ; 83.95,86.75 84,86.7 ; C52.1@84,92 85.651,92 R72.2@86.5,92.849 ; C30.1@93,49.1 93.27,48.83 93.27,44 ; U9.7@93.27,42.2 93.27,44 ; C32.2@98.25,39.901 98.25,43.5 97.75,44 93.27,44
  Top Layer w1: L6.2@77.989,93.776 77.989,92.911 78.9,92 C49.1@81.5,92 C52.1@84,92 84,86.7 84,76.8 82.3,75.1 76.6,75.1 75.6,74.1 C39.1@75.6,68.3 75.6,66.9 ; U11.3@82.25,66.4 76.1,66.4 75.6,66.9 ; v2(88.8,50.2) 88.8,61.1 87.9,62 D21.1@85,62 85,63.488 84.226,64.262 76.454,64.262 75.6,65.116 75.6,66.9
  Bottom Layer w0.5: 14.464,68.961 v1(14.464,73.649) ; v1(68.25,87.95) v1(72.263,87.95)
  Bottom Layer w1: BEEP1.1@10.75,65.75 10.75,67.748 11.963,68.961 14.464,68.961 42.139,68.961 46.863,64.237 74.406,64.237 75.6,65.43 C39.1@75.6,68.3 ; v2(88.8,50.2) 89.9,49.1 C30.1@93,49.1
VCC+12V: C40.1 C42.1 F2.2 J5.4 R41.1 U13.2 | length 196.3
  Top Layer w0.254: U13.2@62.5,91.73 64.146,91.73 64.541,92.126 64.541,95.959 R41.1@64.25,96.25
  Top Layer w0.5: 61.1,91.73 U13.2@62.5,91.73
  Top Layer w1: F2.2@48.1,91.75 48.1,96.1 49.25,97.25 C40.1@56.75,97.25 58.75,97.25 59.5,96.5 59.5,92.4 ; C42.1@59.5,88.5 59.5,92.4 ; 61.1,91.73 60.17,91.73 59.5,92.4
  Bottom Layer w0.5: J5.4@42.36,20.64 42.36,22.624 43.231,23.495 77.876,23.495 79.273,24.892 79.273,42.4 80.873,44 97,44 97.942,44.942 97.942,82.702 83.395,97.25 C40.1@56.75,97.25
VIN: D4.1 J2.1 J2.2 | length 9.8
  Top Layer w1: J2.2@32.21,95.5 J2.1@34.75,95.5 36.5,97.25 D4.1@41.25,97.25
pads on no net: BAT1.0 J5. J5.1 J5.2 J5.3 J5.6 J6. J6.7 J6.8 JTAG.8 U3.5 U4.6 U4.7 U4.8 U4.9 U4.15 U4.16 U4.17 U4.18 U4.33 U4.34 U4.35 U4.36 U4.38 U4.39 U4.40 U4.41 U4.42 U4.43 U4.44 U4.51 U4.52 U4.53 U4.54 U4.55 U4.56 U4.60 U4.61 U4.62 U4.63 U4.64 U4.65 U4.70 U4.71 U4.73 U4.80 U4.81 U4.82 U4.83 U4.84 U4.85 U4.86 U4.87 U4.88 U4.91 U4.98 U5.2 U5.3 U5.5 U5.6 U5.7 U5.8 U5.11 U5.12 U5.13 U5.14 U5.15 U5.17 U5.23 U5.24 U5.25 U5.27 U5.28 U5.34 U5.35 U5.36 U5.37 U5.38 U5.40 U5.41 U5.42 U5.43 U5.44 U5.47 U5.48 U5.49 U5.50 U5.51 U5.67 U5.68 U7.2 U8.3 U14.7 U14.12 U14.13 U14.18 U14.24 U14.26 U14.46 U14.47

## Polygon pours and split planes (outlines as drawn)
NetL6_1 on Top Layer "Top Layer-No Net" (solid, pour order 8): 67.514,94.8 67.126,94.412 67.1,94.412 67.1,91.7 67.3,91.5 67.4,91.4 69.5,91.4 72.8,91.4 73,91.6 73,92.7 73,94.593 72.793,94.8
VCC+3.3V on Top Layer "Top Layer-No Net" (solid, pour order 7): 84.252,71.882 83.82,71.45 83.82,71.399 83.82,65.938 84.226,65.532 84.252,65.557 88.265,65.557 89.332,65.557 89.687,65.913 89.84,66.065 89.84,69.494 89.84,71.476 89.433,71.882
GND on Top Layer "Top Layer-No Net" (solid, remove dead copper, pour order 9): 2,99 1,98 1,90 1,2 2,1 5,1 98,1 99,2 99,5 99,98 98,99
no net on Top Overlay "Top Layer-No Net" (solid): 65.55,48 63.55,46 63.55,44 63.55,41 63.55,28.5 64.55,27.5 65.05,27 67.05,27 82.55,27 84.55,29 84.55,33.5 84.55,46 82.55,48
no net on Top Overlay "Top Layer-No Net" (solid): 73.893,97.25 73.5,96.712 73.5,90.788 73.893,90.25 75.464,90.25 75.857,90.25 76.25,90.788 76.25,93.481 76.25,96.712 75.857,97.25
GND on Bottom Layer "Top Layer-No Net" (solid, remove dead copper, pour order 10): 2,99 1,98 1,2 2,1 5,1 98,1 99,2 99,17 99,98 98,99

## Other copper
Top Layer:
  rectangle net GND: 71.9,48.5 73.1,50.3
  rectangle net GND: 74.9,48.3 75.7,50.3
  rectangle net NetL6_1: 67.3,91.5 68.9,93.2
  pour cut-out: 73,58.5 72.5,58 72.5,49 73.4,48.6 75.1,48.6 75.5,49 75.5,58 75,58.5

## Silkscreen, mask and mechanical layers (free items; w line width, h text height)
Top Overlay:
  lines w0.1: 18.25,90.5 18.25,92.75 ; 20.75,90.5 20.75,92.75 ; 23.5,90.5 23.5,92.75 ; 26.25,90.5 26.25,92.75 ; 31,90.5 31,92.75 ; 63.5,75.5 63.5,77 ; 66.25,75.5 66.25,77 ; 15.5,90.5 15.5,92.75 36.5,92.75 36.5,90.5 15.5,90.5 ; 60,75.5 60,77 69.25,77 69.25,75.5 60,75.5
  lines w1: 47,83 51.3,83
  lines w1.5: 14.297,50.478 22.631,50.478 ; 14.348,53.501 22.682,53.501 ; 36,58.166 36,66.5 ; 39.023,58.191 39.023,66.525
  text "L" at 17.25,92.25 h1.2 r180
  text "H" at 20,92.25 h1.2 r180
  text "TX" at 23,92.25 h1.2 r180
  text "RX" at 25.75,92.25 h1.2 r180
  text "GND" at 30.25,92.25 h1.2 r180
  text "VCC" at 35.5,92.25 h1.2 r180
  text "GND" at 63,76.75 h1 r180
  text "TX" at 65.5,76.75 h1 r180
  text "RX" at 68.5,76.75 h1 r180
  text "Main Board" at 28,69.1 h2.5
  text "+" at 11.7,66.3 h1.2 r270
  text "Social Security V2.4" at 31.6,43 h2.5
  text "20150308" at 38.9,41 h2
  text "SPK-" at 89.5,20 h1 r90
  text "SPK+" at 99,20 h1 r90
  text "Network" at 28.5,11.5 h2 r270
  text "Teminal" at 53,11.5 h2 r270
  text "MIC+" at 89.5,10 h1 r90
  text "MIC-" at 99,10 h1 r90
  text "SIM" at 62.4,8.7 h2 r90
Mechanical 1:
  the board outline again, w0.254